# Altium PCB LED_5730_GHEP.PcbDoc
Units mil, origin at the board's own origin, x right, y up, seen from the top; angles counter-clockwise.
Board outline 900 x 1883.54 mil, 2 copper layers (Top Layer, Bottom Layer); 8 components, 8 nets, 22 pads, 76 vias.
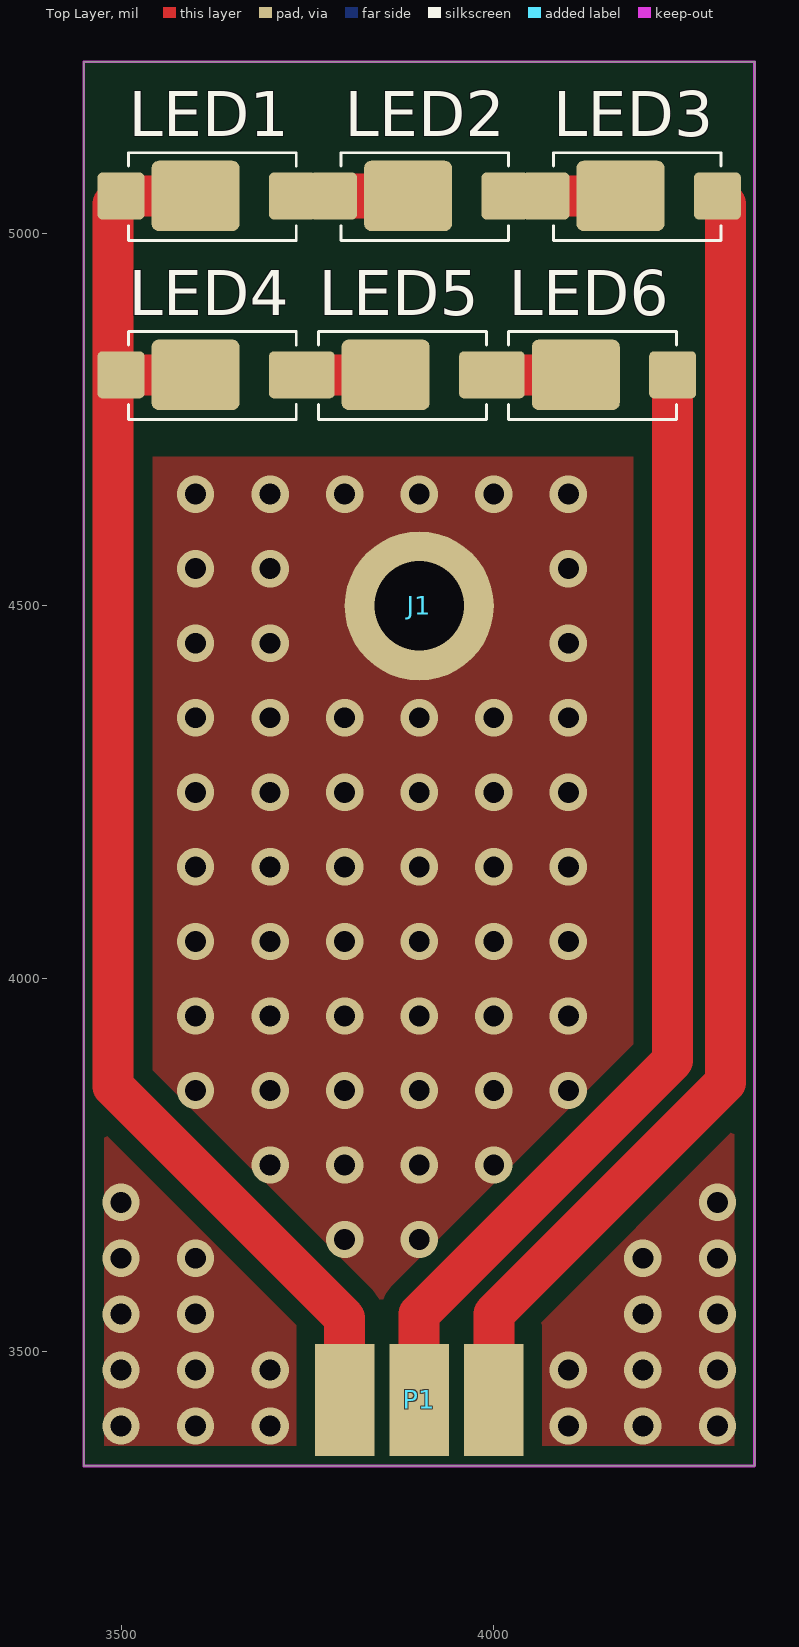
[diagram p0: Top Layer view]
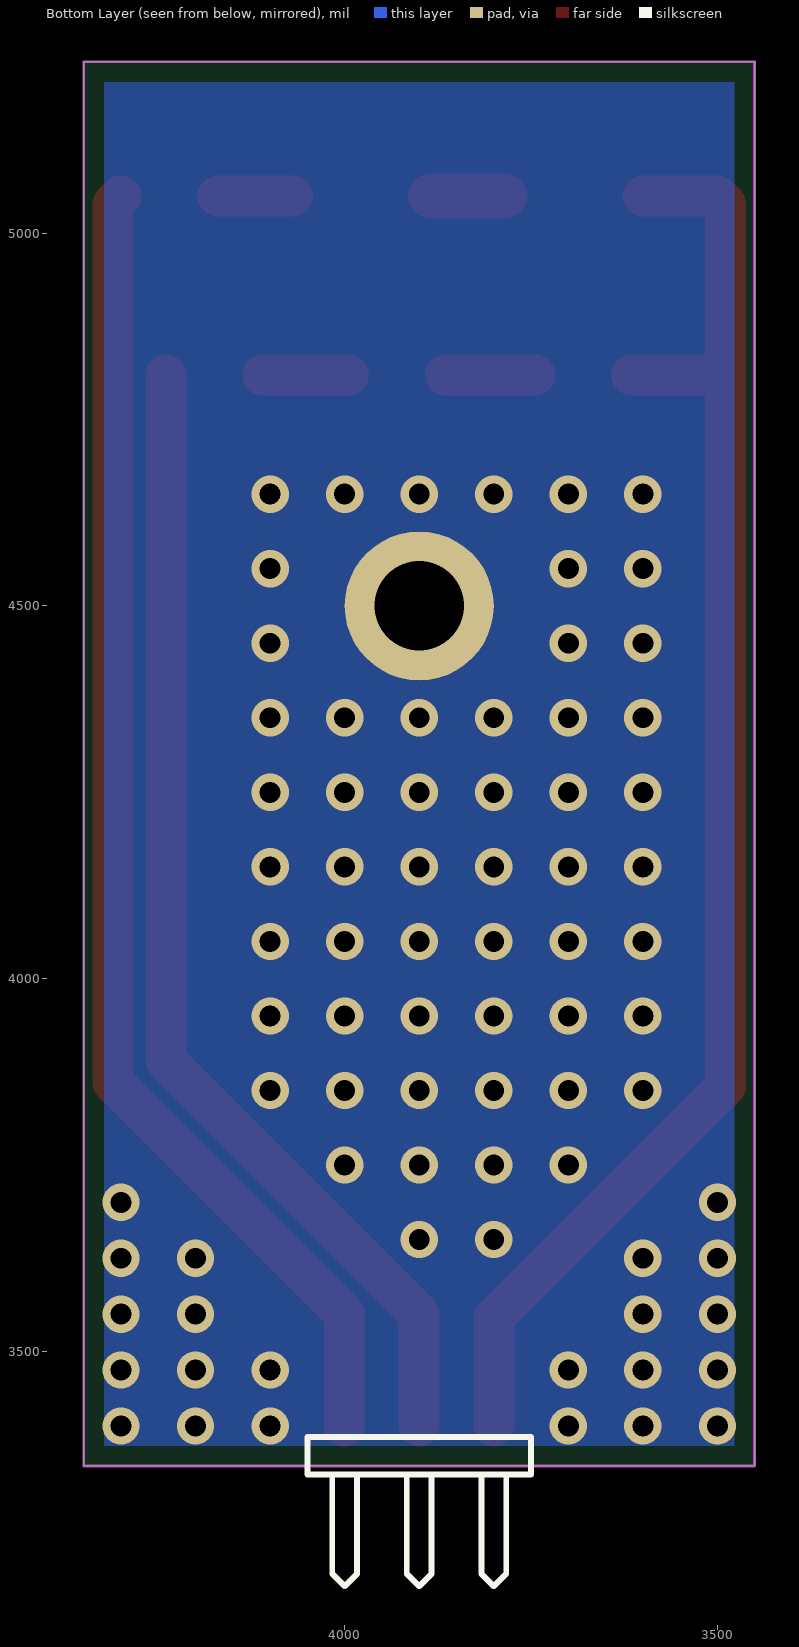
[diagram p1: Bottom Layer view, seen from below]
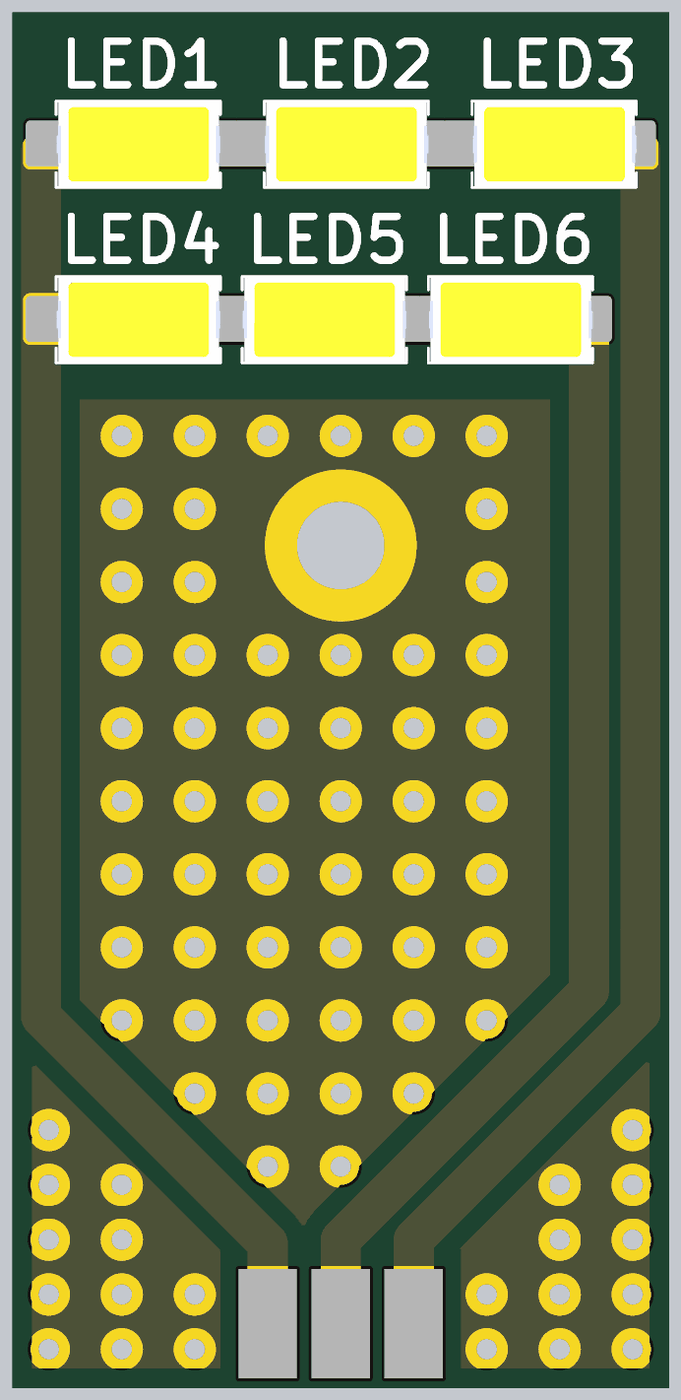
[diagram p2: 3D render of the assembled board from above, using the file's embedded part models]

## Layer stack, top to bottom
Top Solder: solder mask 0.4, Solder Resist, Dk 3.5
Top Layer: signal copper 1.4
Dielectric 1: dielectric 12.6, FR-4, Dk 4.8
Bottom Layer: signal copper 1.4
Bottom Solder: solder mask 0.4, Solder Resist, Dk 3.5

## Board outline
3450,3346.46 4350,3346.46 4350,5230 3450,5230

## Design rules (kind name [scope] priority, off if disabled: settings)
Clearance [All] p1: gap=10 ignorepadtopadclearanceinfootprint=FALSE except(0: Arc-Hole Track-Hole SMDPad-Hole THPad-Hole Via-Hole Fill-Hole Poly-Hole Region-Hole Text-Hole; 25: Arc-Poly Track-Poly SMDPad-Poly THPad-Poly Via-Poly Fill-Poly Poly-Poly)
HoleSize [All] p1: absolutevalues=TRUE maxlimit=200 minlimit=1 maxpercent=80.000 minpercent=20.000
PlaneConnect [All] p1: planeconnectstyle=Direct reliefexpansion=20 reliefentries=4 reliefconductorwidth=10 reliefairgap=10
PolygonConnect [All] p1: connectstyle=Direct reliefconductorwidth=10 reliefentries=4 polygonreliefangle="90 Angle" airgapwidth=10
RoutingVias [All] p1: holewidth=28 width=50 viastyle="Through Hole" minholewidth=28 minwidth=50 maxholewidth=28 maxwidth=50
SolderMaskExpansion [All] p1: expansion=4
Width [All] p1: maxlimit=100 minlimit=10 preferedwidth=10
28 further rules are at their usual default settings.

## Components (designator, comment, footprint, x,y, rotation, side; value= is the part's Value field where it differs from the comment)
J1 "Socket" lobatoc 3900,4500 r0 top
LED1 "LED 5730 chân dán" 5730 3510,4990 r0 top value=LED5730 (schematic designator LED11)
LED2 "LED 5730 chân dán" 5730 3795,4990 r0 top value=LED5730 (schematic designator LED12)
LED3 "LED 5730 chân dán" 5730 4080,4990 r0 top value=LED5730 (schematic designator LED13)
LED4 "LED 5730 chân dán" 5730 3510,4750 r0 top value=LED5730 (schematic designator LED14)
LED5 "LED 5730 chân dán" 5730 3765,4750 r0 top value=LED5730 (schematic designator LED15)
LED6 "LED 5730 chân dán" 5730 4020,4750 r0 top value=LED5730 (schematic designator LED16)
P1 "Jump đực chân thẳng, 2.54mm 3P" HDR1X3H 4000,3435 r180 bottom

## Footprints (in the part's own frame and the unit in brackets; to place one, negate y for a bottom-side part, rotate by r counter-clockwise, add the part's x,y. Pads: shape width x height; smd on the part's side, far side on the other; paste and mask are expansions set on the pad)
5730 [mil]
  rrect20% 62.99x62.99 smd: A(-10,60) K(220,60)
  rrect20% 118.11x94.49 smd: A(90,60)
  silkscreen extent 0,0 225,118, body extent 1,0 225,118, height 35
HDR1X3H [mil] "Connector; Header; 3 Position; Right Angle"
  rect 80x150 smd far side: 1(0,0) 2(100,0) 3(200,0)
  silkscreen extent -50,-250 250,-50
lobatoc [mil]
  round 200 hole 120: 0(0,0)

## Part data
LED1 LED2 LED3 LED4 LED5 LED6: library part LED_SMD_Blue_0805_100mcd, "LED 0805 SMD Blue 100mcd 470nm", Color=LED5730, Manufacturer 1=Ligitek, Manufacturer Part Number 1=LG-170DBKZ-CT, Package / Case=0805, Ratings="100 mcd; 470 nm", Material=InGaN/GaN
P1: library part "Header 3H", "Header, 3-Pin, Right Angle", LatestRevisionDate=17-Jul-2002, LatestRevisionNote="Re-released for DXP Platform.", Publisher="Altium Limited"
J1: LatestRevisionDate=17-Jul-2002, LatestRevisionNote="Re-released for DXP Platform.", Publisher="Altium Limited"

## Via types
v1: diameter 50, hole 28, Top Layer to Bottom Layer, 76 vias

## Nets (pads, with @x,y where several pads share a name; then routed paths per layer and width w, separated by ;. In a path a pad name is that pad's centre, name@x,y a point inside that pad or via, vN(x,y) a via of type N, cw(c..) or ccw(c..) an arc to the next point about the centre after c; other vN are vias at no path point)
GND: J1.0
  other v1: 3500,3400 3600,3400 3700,3400 4100,3400 4200,3400 4300,3400 3500,3475 3600,3475 3700,3475 4100,3475 4200,3475 4300,3475 3500,3550 3600,3550 4200,3550 4300,3550 3500,3625 3600,3625 4200,3625 4300,3625 3800,3650 3900,3650 3500,3700 4300,3700 3700,3750 3800,3750 3900,3750 4000,3750 3600,3850 3700,3850 3800,3850 3900,3850 4000,3850 4100,3850 3600,3950 3700,3950 3800,3950 3900,3950 4000,3950 4100,3950 3600,4050 3700,4050 3800,4050 3900,4050 4000,4050 4100,4050 3600,4150 3700,4150 3800,4150 3900,4150 4000,4150 4100,4150 3600,4250 3700,4250 3800,4250 3900,4250 4000,4250 4100,4250 3600,4350 3700,4350 3800,4350 3900,4350 4000,4350 4100,4350 3600,4450 3700,4450 4100,4450 3600,4550 3700,4550 4100,4550 3600,4650 3700,4650 3800,4650 3900,4650 4000,4650 4100,4650
NetLED1_A: LED1.A LED4.A P1.3 | length 2008.5
  Top Layer w55: LED1.A@3600,5050 3500,5050 3489.47,5039.47 LED4.A@3489.47,4810 ; LED4.A@3615,4810 3600,4810 3500,4810 LED4.A@3489.47,4810 ; P1.3@3800,3400 P1.3 3800,3545 3489.47,3855.53 LED4.A@3489.47,4810
NetLED1_K: LED1.K LED2.A | length 100
  Top Layer w60: LED2.A@3785,5050 LED2.A@3885,5050
NetLED2_K: LED2.K LED3.A | length 100
  Top Layer w55: LED3.A@4070,5050 LED3.A@4170,5050
NetLED3_K: LED3.K P1.1 | length 1783
  Top Layer w55: P1.1@4000,3400 P1.1 4000,3550 4310.53,3860.53 4310.53,5039.47 LED3.K
NetLED4_K: LED4.K LED5.A | length 120
  Top Layer w55: LED4.K@3745,4810 3755,4810 3855,4810 LED5.A@3865,4810
NetLED5_K: LED5.K LED6.A | length 115
  Top Layer w55: LED5.K@3995,4810 4010,4810 LED6.A@4110,4810
NetLED6_K: LED6.K P1.2 | length 1550.8
  Top Layer w55: P1.2@3900,3400 P1.2 3900,3550 4240,3890 LED6.K

## Polygon pours and split planes (outlines as drawn)
GND on Bottom Layer "Bottom Layer-No Net" (solid, pour order 30): 3450,5229.41 4349.41,5229.41 4349.41,3345.86 3450,3345.86
GND on Top Layer "Bottom Layer-No Net" (solid, pour order 32): 4350,4700 3450.59,4700 3450.59,3345.86 4350,3345.86

## Keep-outs
Keep-Out Layer:
  the board outline again, w3.94

## Silkscreen, mask and mechanical layers (free items; w line width, h text height)
Bottom Solder:
  rectangle: 3450,3346.46 4350,5230